# Altium PCB PCB_LM1117MP-3.3.PcbDoc
Units mil, origin at the board's own origin, x right, y up, seen from the top; angles counter-clockwise.
Board outline not stored, 2 copper layers (Top Layer, Bottom Layer); 8 components, 0 nets, 18 pads, 5 vias.
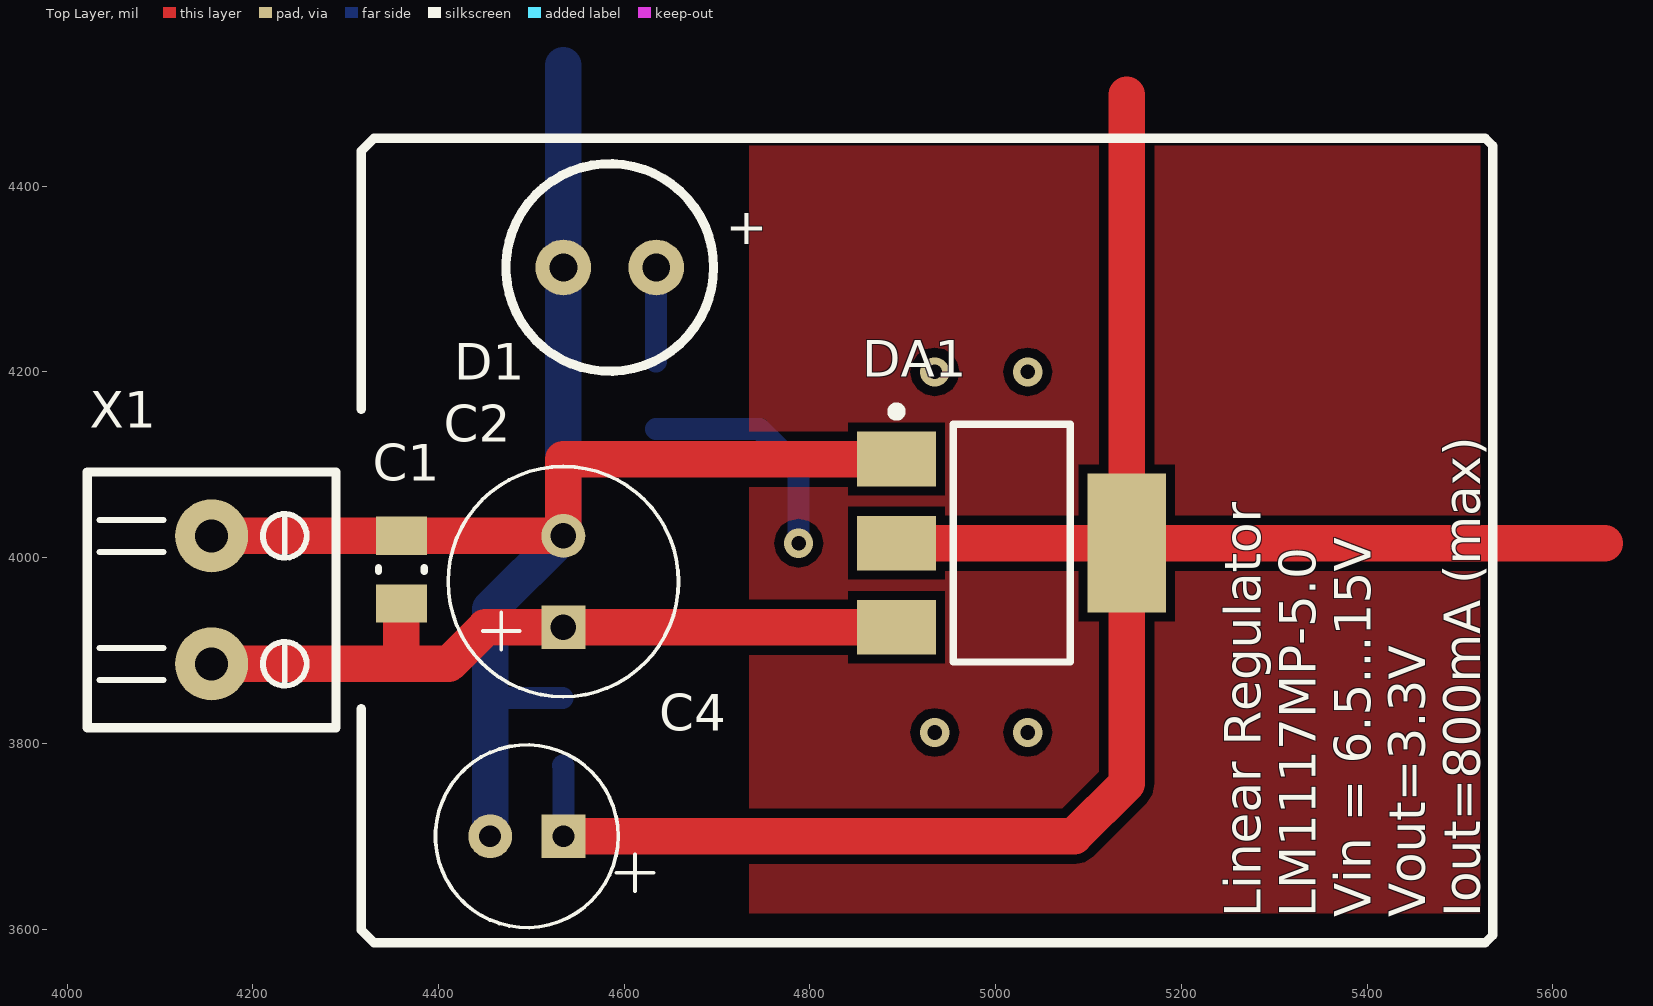
[diagram p0: Top Layer view]
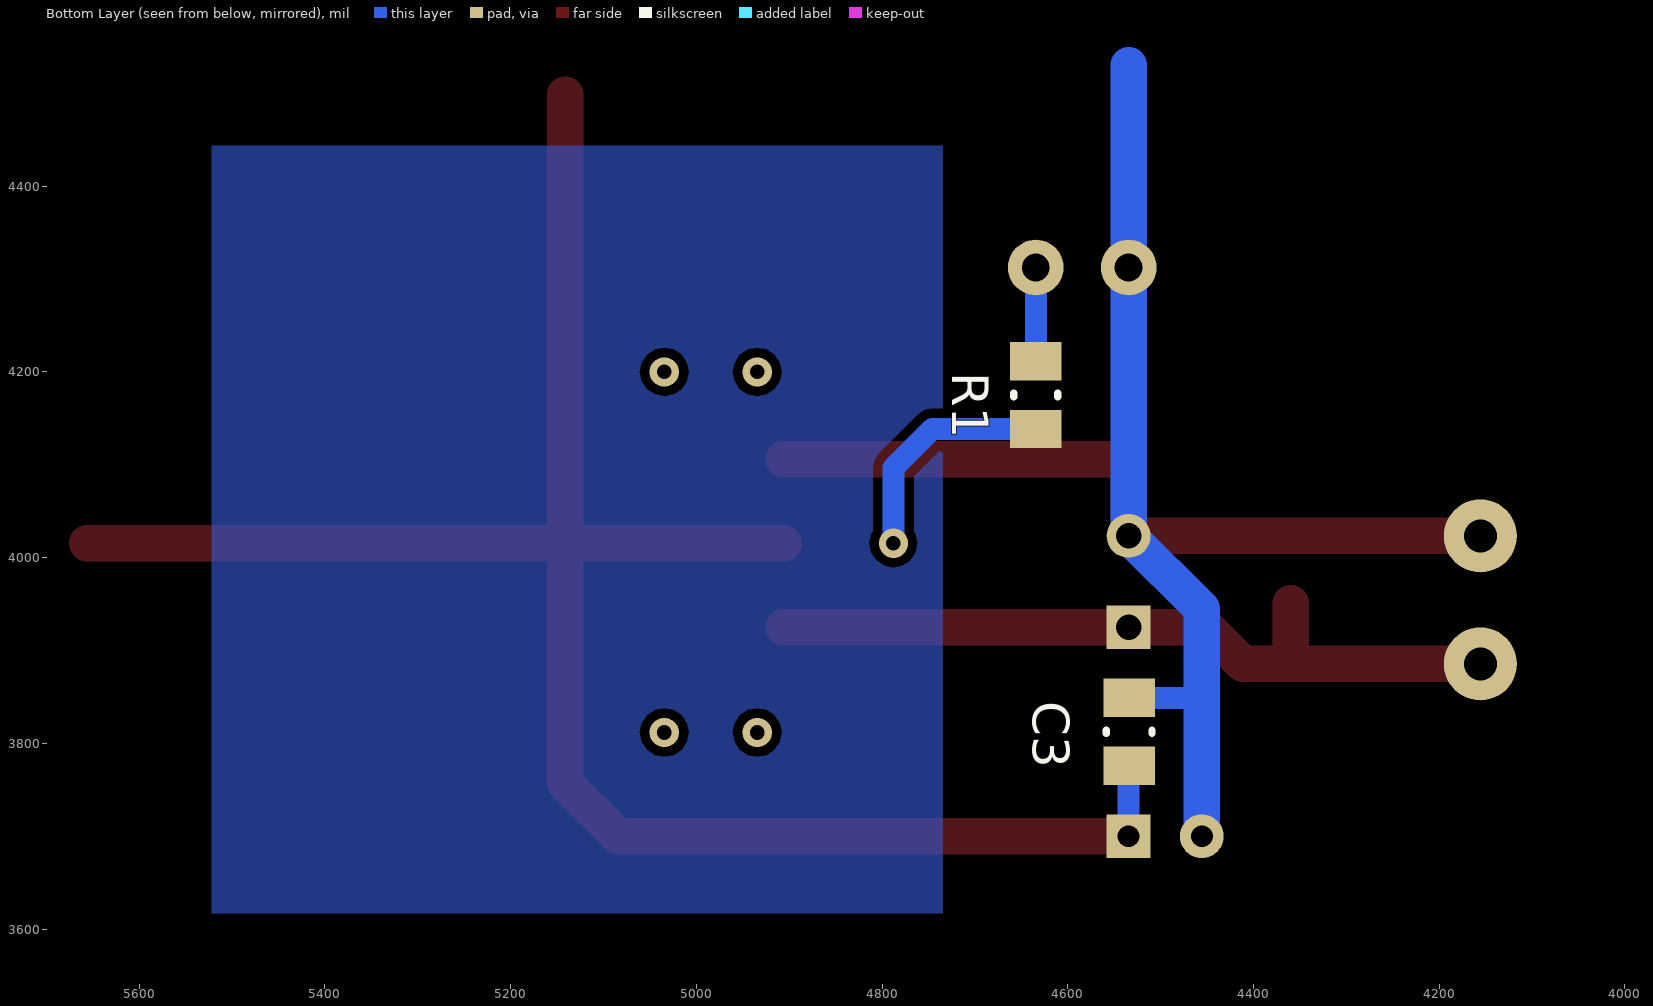
[diagram p1: Bottom Layer view, seen from below]

## Layer stack, top to bottom
Top Solder: solder mask 0.4, Solder Resist, Dk 3.5
Top Layer: signal copper 1.4
Dielectric 1: dielectric 12.6, FR-4, Dk 4.8
Bottom Layer: signal copper 1.4
Bottom Solder: solder mask 0.4, Solder Resist, Dk 3.5

## Components (designator, comment, footprint, x,y, rotation, side; value= is the part's Value field where it differs from the comment)
C1 "100nF" Capacitor_0805 4360.07,3987.01 r90 top
C2 "47uF" Capacitor_Electrolit_6.3x11 4534.45,3925 r90 top
C3 "10nF" Capacitor_0805 4533.83,3812.5 r90 bottom
C4 "47uF" CAPACITOR+_22uFx25V 4534.45,3700 r180 top
D1 "LED_2.54mm_R" LED_2.54mm_R 4534.45,4312.5 r0 top
DA1 "LM1117MP-3.3" NCP1117_SOT223 5017.22,4015.55 r0 top
R1 "1k" RESISTOR_SMD0805 4634.45,4175 r270 bottom
X1 "Connector_DG350-3.5-02P-14" CONNECTOR_DG350-3.5-02P-14 4155.71,4023.43 r270 top

## Footprints (in the part's own frame and the unit in brackets; to place one, negate y for a bottom-side part, rotate by r counter-clockwise, add the part's x,y. Pads: shape width x height; smd on the part's side, far side on the other; paste and mask are expansions set on the pad)
CAPACITOR+_22uFx25V [mm]
  rect 1.2x1.2 hole 0.6 mask+0.1: 1(0,0)
  round 1.2 hole 0.6 mask+0.1: 2(2,0)
  silkscreen extent -2.47,-2.5 3.5,2.5, body extent -1.11,-2.11 3.11,2.11, height 7.19
Capacitor_0805 [mm]
  rect 1.05x1.4 smd: 1(-0.925,0) 2(0.925,0)
  silkscreen extent -0.05,-0.63 0.05,0.63, body extent -1,-0.63 1,0.63, height 1.3
Capacitor_Electrolit_6.3x11 [mm]
  rect 1.2x1.2 hole 0.7 mask+0.1: 1(0,0)
  round 1.2 hole 0.7 mask+0.1: 2(2.5,0)
  silkscreen extent -1.9,-3.15 4.4,3.15, body extent -1.87,-3.15 4.42,3.15, height 11.8
CONNECTOR_DG350-3.5-02P-14 [mm]
  round 2 hole 0.9: 1(0,0) 2(3.5,0)
  silkscreen extent -1.75,-3.4 5.25,3.4, body extent -2.25,-3.4 5.75,3.4, height 8.4
LED_2.54mm_R [mil]
  round 60 hole 30 mask+3.94: 1(0,0) 2(100,0)
  silkscreen extent -62,-112 162,112, body extent -45,-115 165,115, height 343
NCP1117_SOT223 [mm]
  rect 2.15x1.5 smd: 1(-3.15,2.3) 2(-3.15,0) 3(-3.15,-2.3)
  rect 2.15x3.8 smd: 2(3.15,0)
  silkscreen extent -3.27,-3.25 1.6,3.72, body extent -3.65,-3.35 3.65,3.35, height 1.8
RESISTOR_SMD0805 [mm]
  rect 1.05x1.4 smd: 1(-0.925,0) 2(0.925,0)
  silkscreen extent -0.05,-0.6 0.05,0.6, body extent -1.1,-0.7 1.1,0.7, height 0.5

## Part data
C1 C3: library part Capacitor_0805
C2: library part Capacitor+_6.3x11
C4: library part Capacitor+_22uFx25V
R1: library part Resistor_0805

## Via types
v1: diameter 31.5, hole 15.75, Top Layer to Bottom Layer, 5 vias

## Nets (pads, with @x,y where several pads share a name; then routed paths per layer and width w, separated by ;. In a path a pad name is that pad's centre, name@x,y a point inside that pad or via, vN(x,y) a via of type N, cw(c..) or ccw(c..) an arc to the next point about the centre after c; other vN are vias at no path point)
pads on no net: C1.1 C1.2 C2.1 C2.2 C3.1 C3.2 C4.1 C4.2 D1.1 D1.2 DA1.1 DA1.2 DA1.3 R1.1 R1.2 X1.1 X1.2
copper on no net: | length 5146.1
  Top Layer w39.37: 4155.71,3885.63 4355.71,3885.63 ; 4155.71,4023.43 4360.07,4023.43 4534.45,4023.43 4534.45,4106.1 4893.21,4106.1 4905.95,4106.1 ; 4360.07,3950.59 4360.07,3889.99 4355.71,3885.63 ; 4534.45,3700 5084.45,3700 5141.24,3756.79 5141.24,4015.55 ; 4905.95,3925 4893.21,3925 4534.45,3925 4450.56,3925 4411.19,3885.63 4355.71,3885.63 ; 4905.95,4015.55 5141.24,4015.55 ; 5141.24,4498.57 5141.24,4015.55 ; 5153.98,4015.55 5655.85,4015.55
  Bottom Layer w23.62: 4455.71,3850 4456.79,3848.92 4533.83,3848.92 ; 4533.83,3776.08 4534.45,3775.46 4534.45,3700 ; 4634.45,4138.58 4745.87,4138.58 4787.83,4096.61 v1(4787.83,4015.55) ; 4634.45,4211.42 4634.45,4312.5
  Bottom Layer w39.37: 4455.71,3700 4455.71,3850 4455.71,3944.68 4534.45,4023.43 4534.45,4312.5 4534.45,4530.16
  other v1: 4934.45,3811.71 5034.45,3811.71 4934.45,4200 5034.45,4200

## Polygon pours and split planes (outlines as drawn)
no net on Top Layer "Top Layer-No Net 1" (solid, pour order 2): 4734.45,4443.7 5521.85,4443.7 5521.85,3616.93 4734.45,3616.93
no net on Bottom Layer "Top Layer-No Net 1" (solid, pour order 0): 5521.85,4443.7 4734.45,4443.7 4734.45,3616.93 5521.85,3616.93

## Other copper
Bottom Layer:
  pour cut-out: 4496.43,3879.43 4571.23,3879.43 4571.23,3745.57 4496.43,3745.57

## Silkscreen, mask and mechanical layers (free items; w line width, h text height)
Top Overlay:
  lines w10: 4316.93,3837.4 4316.93,3614.76 4316.93,3599.02 4330.51,3585.43 5527.36,3585.43 5535.24,3593.31 5535.24,4443.7 5527.36,4451.57 4330.51,4451.57 4316.93,4437.99 4316.93,4420.08 4316.93,4159.85
  text "Linear Regulator / LM1117MP-5.0 / Vin = 6.5...15V / Vout=3.3V / Iout=800mA (max)" at 5521.95,3612.5 h39.37 r90

## Text inside footprints (layer, text, board x,y; h text height)
D1: Top Overlay "+" at 4709.45,4337.5 h39.37